# Altium PCB TIDA-00042.PcbDoc
Units mm, origin at the board's own origin, x right, y up, seen from the top; angles counter-clockwise.
Board outline 50 x 50 mm, 2 copper layers (Top Layer, Bottom Layer); 33 components, 22 nets, 90 pads, 186 vias.
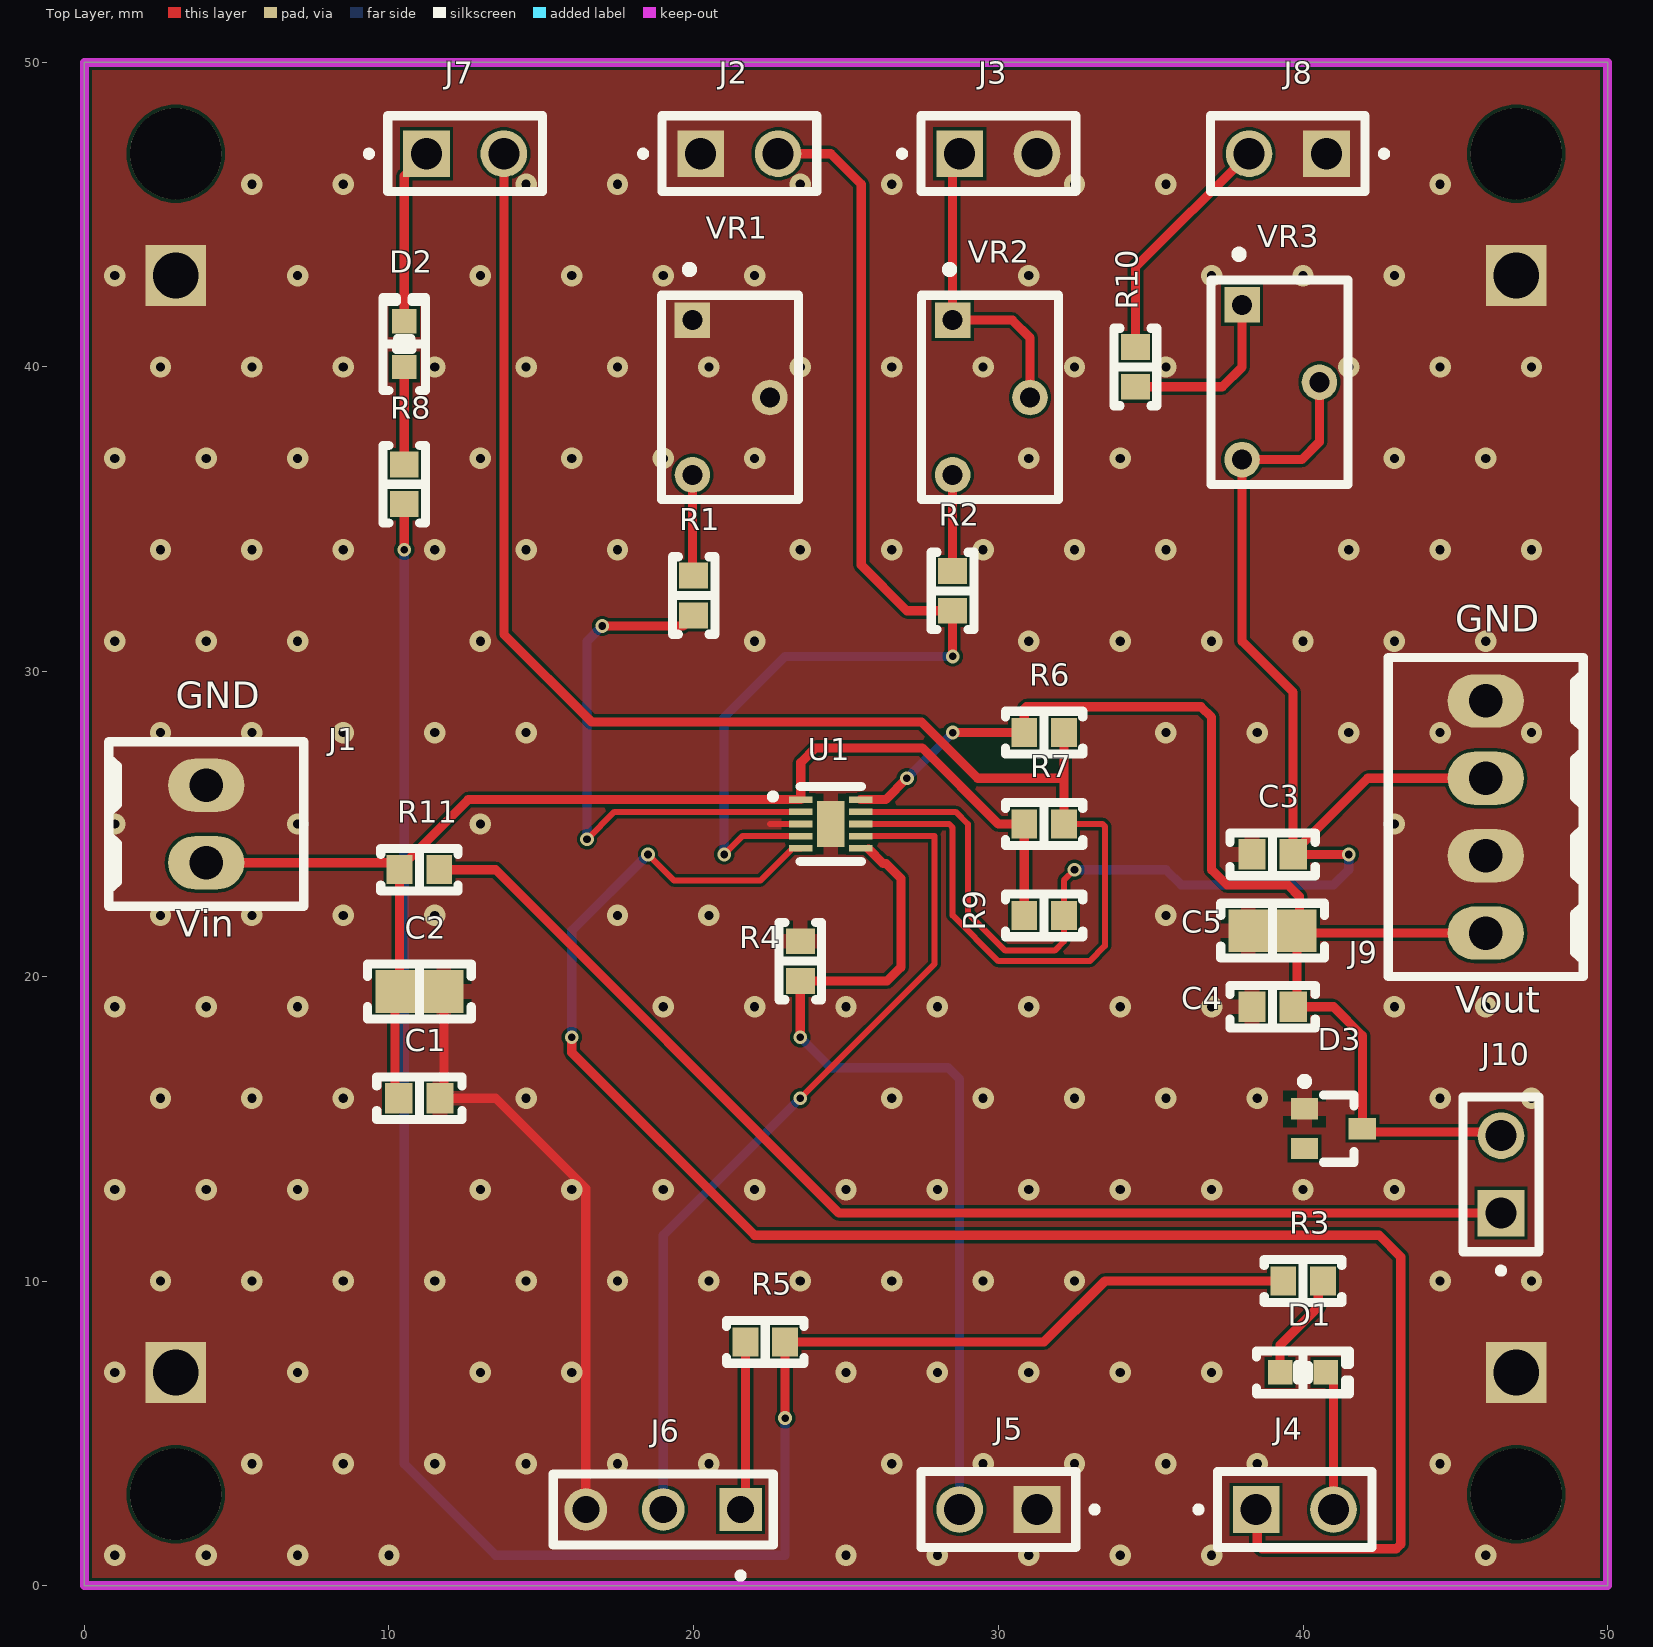
[diagram p0: Top Layer view]
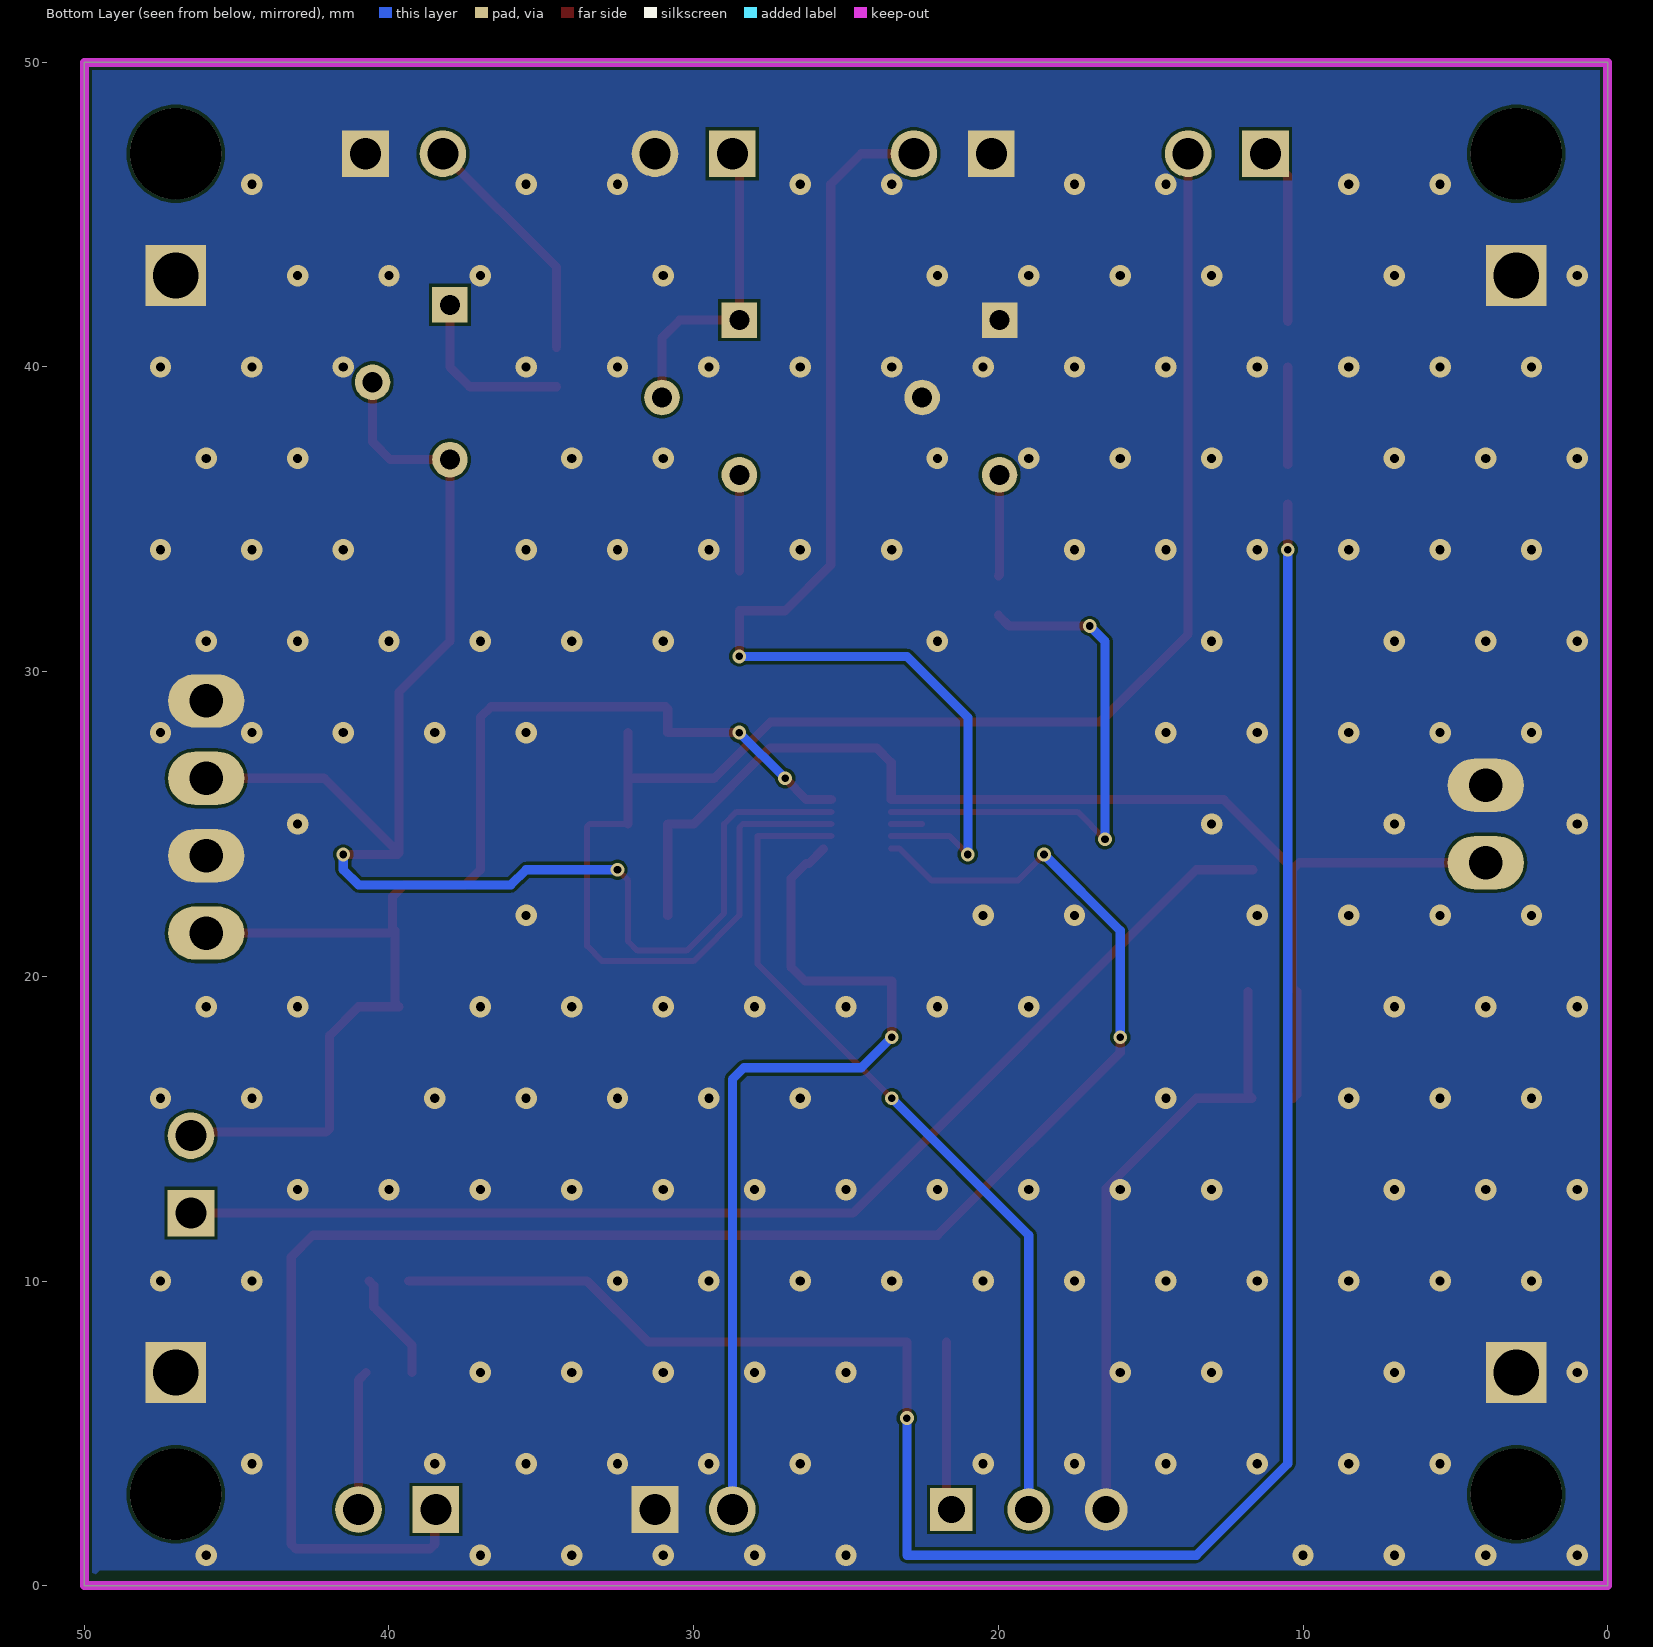
[diagram p1: Bottom Layer view, seen from below]
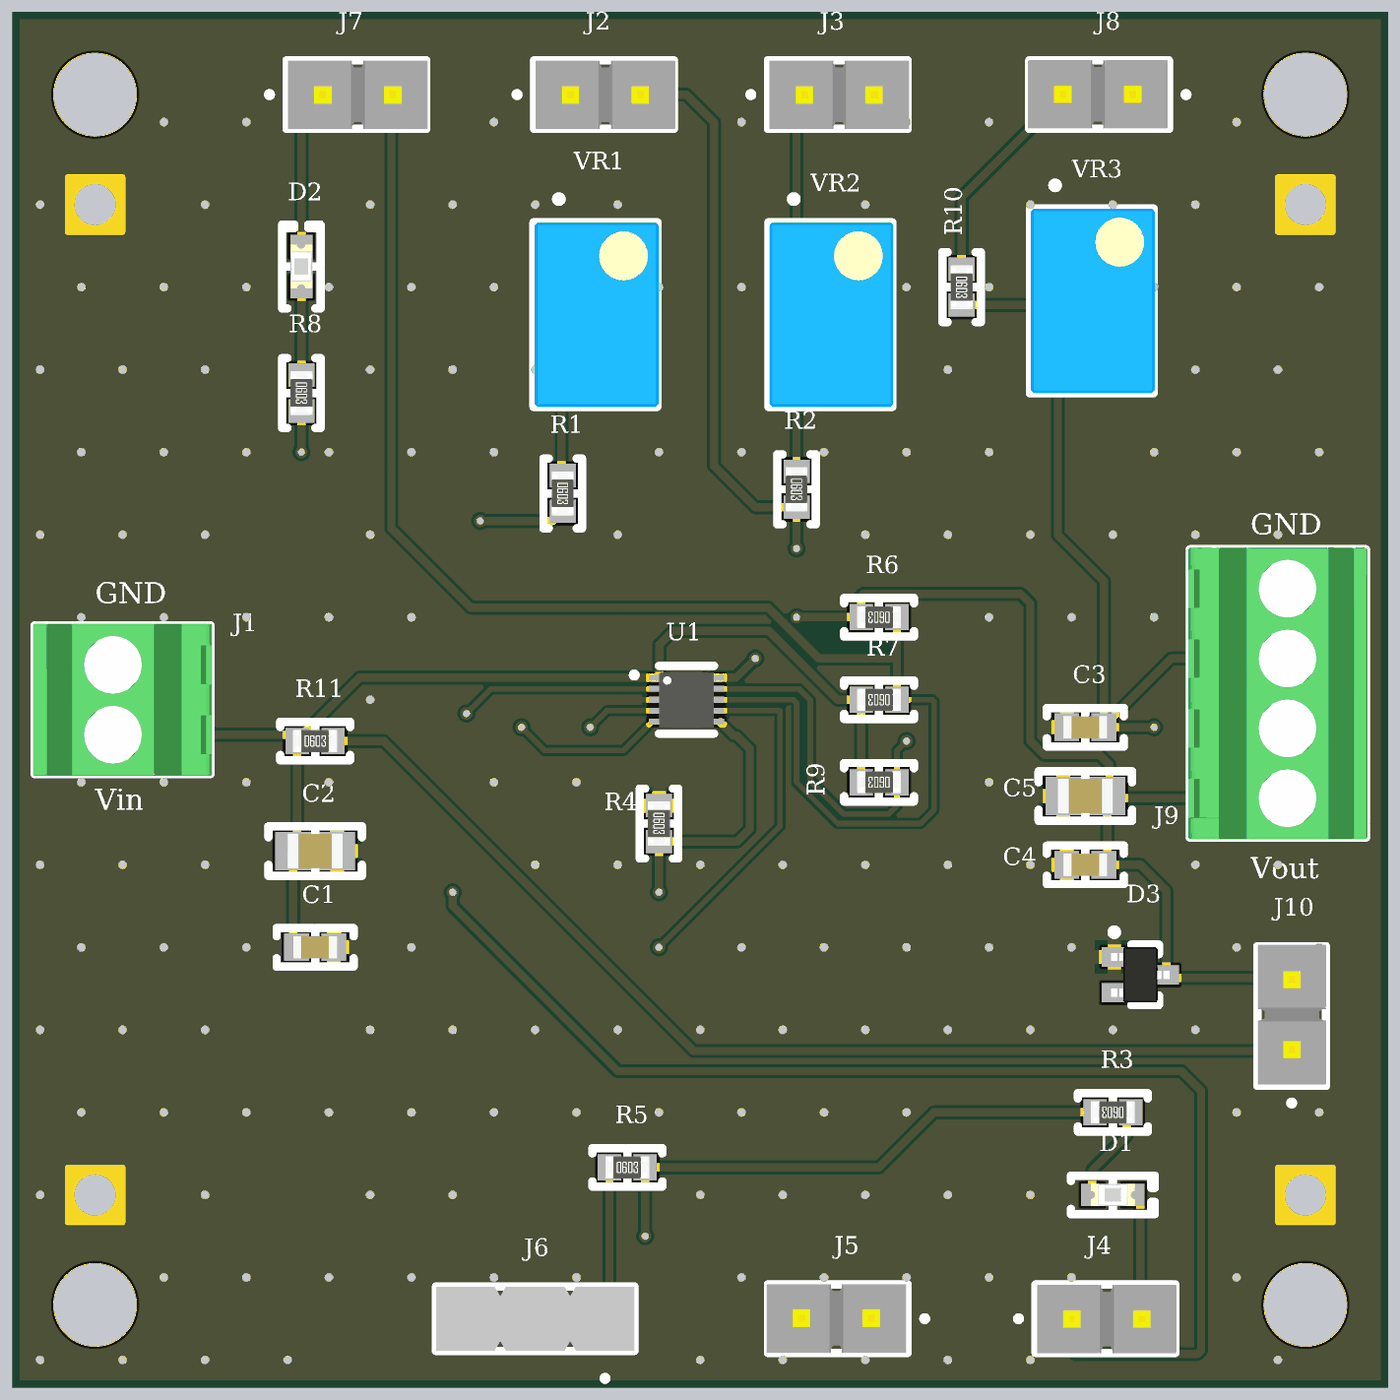
[diagram p2: 3D render of the assembled board from above, using the file's embedded part models]

## Layer stack, top to bottom
Top Solder: solder mask 0.0102, Solder Resist, Dk 3.5
Top Layer: signal copper 0.0356
Dielectric 1: dielectric 0.32, FR-4, Dk 4.8
Bottom Layer: signal copper 0.0356
Bottom Solder: solder mask 0.0102, Solder Resist, Dk 3.5

## Board outline
0,0 0,50 50,50 50,0

## Design rules (kind name [scope] priority, off if disabled: settings)
Clearance [All] p1: gap=0.102 ignorepadtopadclearanceinfootprint=FALSE
PolygonConnect [All] p1: thpad.connectstyle=Direct thpad.reliefconductorwidth=0.5 thpad.reliefentries=4 thpad.polygonreliefangle="90 Angle" thpad.airgapwidth=0.25 smdpad.connectstyle=Relief smdpad.reliefconductorwidth=0.5 smdpad.reliefentries=4 smdpad.polygonreliefangle="90 Angle" smdpad.airgapwidth=0.25 via.connectstyle=Direct via.reliefconductorwidth=0.5 via.reliefentries=4 via.polygonreliefangle="90 Angle" via.airgapwidth=0.25
RoutingVias [All] p1: holewidth=0.25 width=0.45 viastyle="Through Hole" minholewidth=0.2 minwidth=0.45 maxholewidth=1 maxwidth=1.6
SolderMaskExpansion [All] p1: expansion=0.102 istentingtop=FALSE
Width [All] p1: maxlimit=1 minlimit=0.102 preferedwidth=0.2
30 further rules are at their usual default settings.

## Components (designator, comment, footprint, x,y, rotation, side; value= is the part's Value field where it differs from the comment)
C1 "1 µF" "CAP 0603_1608" 11,16 r180 top
C2 "1µF" "CAP 0805_2012" 11,19.5 r180 top
C3 "2.2 µF" "CAP 0603_1608" 39,24 r0 top
C4 "2.2 µF" "CAP 0603_1608" 39,19 r0 top
C5 "2.2 µF" "CAP 0805_2012" 39,21.5 r0 top
D1 "Green" "LED 0603_1608 GREEN" 40,7 r0 top
D2 "Green" "LED 0603_1608 GREEN" 10.5,40.75 r90 top
D3 "BZX84C5V6W-7-F" "DIODES SOT-323-3" 41,15 r0 top
J1 "282834-2" "TE 282834-2" 4,25 r90 top
J2 "ASI GND" SAMTEC_HTSW-102-08-L-S 21.5,47 r180 top
J3 "PRETERM" SAMTEC_HTSW-102-08-L-S 30,47 r180 top
J4 "PG" SAMTEC_HTSW-102-08-L-S 39.73,2.5 r180 top
J5 "ASO GND" SAMTEC_HTSW-102-08-L-S 30,2.5 r0 top
J6 "5-146280-3" TE_5-146280-3 19,2.5 r180 top
J7 "CHG" SAMTEC_HTSW-102-08-L-S 12.5,47 r180 top
J8 "TS" SAMTEC_HTSW-102-08-L-S 39.5,47 r0 top
J9 "282834-4" "TE 282834-4" 46,25.23 r270 top
J10 "HTSW-102-08-L-S" SAMTEC_HTSW-102-08-L-S 46.5,13.5 r270 top
R1 "680 Ohms" "RES 0603_1608" 20,32.5 r270 top
R2 "1 kOhms" "RES 0603_1608" 28.5,32.65 r270 top
R3 "1.5 kOhms" "RES 0603_1608" 40,10 r180 top
R4 "100 kOhms" "RES 0603_1608" 23.5,20.5 r270 top
R5 "10 kOhms" "RES 0603_1608" 22.35,8 r0 top
R6 "0 Ohms" "RES 0603_1608" 31.5,28 r180 top
R7 "0 Ohms" "RES 0603_1608" 31.5,25 r180 top
R8 "1.5 kOhms" "RES 0603_1608" 10.5,36.15 r270 top
R9 "0 Ohms" "RES 0603_1608" 31.5,22 r180 top
R10 "1 kOhms" "RES 0603_1608" 34.5,40 r270 top
R11 "100 kOhms" "RES 0603_1608" 11,23.5 r0 top
U1 "BQ24041DSQ" SON40P200X200X80-11N 24.5,25 r0 top
VR1 "3266W-1-103LF" TRIM_3266W-1-103LF 19.96,39 r270 top
VR2 "3266W-1-103LF" TRIM_3266W-1-103LF 28.5,39 r270 top
VR3 "3266W-1-103LF" TRIM_3266W-1-103LF 38,39.5 r270 top

## Footprints (in the part's own frame and the unit in brackets; to place one, negate y for a bottom-side part, rotate by r counter-clockwise, add the part's x,y. Pads: shape width x height; smd on the part's side, far side on the other; paste and mask are expansions set on the pad)
"CAP 0603_1608" [mm] "Chip Capacitor, 2-Leads, Body 1.60x0.80mm, IPC Medium Density"
  rect 0.9x1 smd: 1(-0.675,0) 2(0.675,0)
  silkscreen extent -1.4,-0.7 1.4,0.7, body extent -0.8,-0.41 0.8,0.41, height 0.82
"CAP 0805_2012" [mm] "Chip Capacitor, 2-Leads, Body 2.00x1.20mm, IPC Medium Density"
  rect 1.3x1.4 smd: 1(-0.8,0) 2(0.8,0)
  silkscreen extent -1.7,-0.9 1.7,0.9, body extent -1,-0.64 1,0.64, height 1.26
"DIODES SOT-323-3" [mm] "SOT323, 3-Leads, Body 2.00x2.10mm, Pitch 0.65mm, IPC Medium Density"
  rect 0.9x0.7 smd: 1(-0.95,0.65) 2(0.95,0) 3(-0.95,-0.65)
  silkscreen extent -1.07,-1.1 0.67,1.67, body extent -1.06,-1 1.06,1, height 1
"LED 0603_1608 GREEN" [mm] "Chip Diode, 2-Leads, Body 1.60x0.80mm, IPC Medium Density"
  rect 0.8x0.8 smd: 1(-0.75,0) 2(0.75,0)
  silkscreen extent -1.52,-0.7 1.52,0.7, body extent -0.8,-0.4 0.8,0.4, height 0.53
"RES 0603_1608" [mm] "Chip Resistor, 2-Leads, Body 1.60x0.80mm, IPC Medium Density"
  rect 0.85x0.95 smd: 1(-0.65,0) 2(0.65,0)
  silkscreen extent -1.27,-0.7 1.27,0.7, body extent -0.8,-0.4 0.8,0.4, height 0.45
SAMTEC_HTSW-102-08-L-S [mm]
  rect 1.53x1.53 hole 1.02: 01(1.27,0)
  round 1.53 hole 1.02: 02(-1.27,0)
  silkscreen extent -2.54,-1.24 3.26,1.24, body extent -2.59,-1.23 2.49,1.26, height 8.38
SON40P200X200X80-11N [mm]
  rect 0.76x0.22 smd: 1(-0.985,0.8) 2(-0.985,0.4) 3(-0.985,0) 4(-0.985,-0.4) 5(-0.985,-0.8) 6(0.985,-0.8) 7(0.985,-0.4) 8(0.985,0) 9(0.985,0.4) 10(0.985,0.8)
  rect 0.9x1.5 smd paste-2: 11(0,0)
  silkscreen extent -2,-1.23 1,1.23, body extent -1,-1 1,1, height 0.8
"TE 282834-2" [mm]
  oval 1.75x2.5 hole 1.1: 1(-1.27,0) 2(1.27,0)
  silkscreen extent -2.7,-3.2 2.7,3.2, body extent -2.77,-3.25 2.77,3.25, height 10
"TE 282834-4" [mm]
  oval 1.75x2.5 hole 1.1: 1(-3.81,0) 2(-1.27,0) 3(1.27,0) 4(3.81,0)
  silkscreen extent -5.24,-3.2 5.24,3.2, body extent -5.31,-3.25 5.31,3.25, height 10
TE_5-146280-3 [mm]
  rect 1.398x1.398 hole 0.89: 1(-2.54,0)
  round 1.398 hole 0.89: 2(0,0) 3(2.54,0)
  silkscreen extent -3.61,-1.17 3.61,2.27, body extent -3.61,-1.17 3.61,1.17, height 8.38
TRIM_3266W-1-103LF [mm]
  rect 1.168x1.168 hole 0.66: 1(-2.54,0)
  round 1.168 hole 0.66: 2(0,2.54) 3(2.54,0)
  silkscreen extent -4.3,-1.02 3.35,3.48, body extent -3.35,-0.98 3.35,3.52, height 9.72

## Part data
C1: library part CC0603KRX5R8BB105, "CAP CER 1UF 25V X5R 0603", Device Package="0603 (1608 Metric)", manufacturer=Yageo, Operating Temperature="-55°C ~ 85°C", Supplier Part Number 1=311-1445-1-ND, Temperature Coefficient=X5R, Tolerance=±10%, Voltage - Rated=25V, Applications="General Purpose", Capacitance="1 µF", componentlink1description=Datasheet, componentlink1url=https://www.yageo.com/upload/media/product/productsearch/datasheet/mlcc/UPY-GPHC_X5R_4V-to-50V_25.pdf, componentlink2description="DigiKey Link", componentlink2url=https://www.digikey.com/en/products/detail/yageo/CC0603KRX5R8BB105/2833610, lastupdated="25.08.2022 06:49:33", Lifecycle Status=Active, Minimum Order=1, Mounting Type="Surface Mount, MLCC", Package / Case="0603 (1608 Metric)", packaging=TapeAndReel, Part Number=CC0603KRX5R8BB105, Part Status=Active, partid=5146, price=0.01, series=CC, Size / Dimension="0.063\" L x 0.031\" W (1.60mm x 0.80mm)", Supplier 1=DigiKey, Thickness (Max)="0.035\" (0.90mm)"
C2: library part 08053D105KAT2A, "CAP CER 1UF 25V X5R 0805", Device Package="0805 (2012 Metric)", manufacturer="AVX Corporation", Operating Temperature="-55°C ~ 85°C", Supplier Part Number 1=478-1409-1-ND, Temperature Coefficient=X5R, Tolerance=±10%, Voltage - Rated=25V, Applications="General Purpose", Capacitance=1µF, componentlink1description=Datasheet, componentlink1url=http://datasheets.avx.com/cx5r.pdf, componentlink2description="DigiKey Link", componentlink2url=http://digikey.com/product-detail/en/avx-corporation/08053D105KAT2A/478-1409-1-ND/564441, lastupdated="2.09.2020 01:04:40", Lifecycle Status=Active, Minimum Order=1, Mounting Type="Surface Mount, MLCC", Package / Case="0805 (2012 Metric)", packaging=TapeAndReel, Part Number=08053D105KAT2A, Part Status=Active, partid=3127, price=0.12, series=-, Size / Dimension="0.079\" L x 0.049\" W (2.01mm x 1.25mm)", Supplier 1=DigiKey, Thickness (Max)="0.055\" (1.40mm)"
C3: library part CL10A225KA5LNNC, "CAP CER 2.2UF 25V X5R 0603", Device Package="0603 (1608 Metric)", manufacturer="Samsung Electro-Mechanics", Operating Temperature="-55°C ~ 85°C", Supplier Part Number 1=1276-1878-1-ND, Temperature Coefficient=X5R, Tolerance=±10%, Voltage - Rated=25V, Applications="General Purpose", Capacitance="2.2 µF", componentlink1description=Datasheet, componentlink1url=http://www.samsungsem.com/kr/support/product-search/mlcc/CL10A225KA5LNNC.jsp, componentlink2description="DigiKey Link", componentlink2url=https://www.digikey.com/en/products/detail/samsung-electro-mechanics/CL10A225KA5LNNC/3887536, Features="Low Profile", lastupdated="25.08.2022 06:49:10", Lifecycle Status=Active, Minimum Order=1, Mounting Type="Surface Mount, MLCC", Package / Case="0603 (1608 Metric)", packaging=TapeAndReel, Part Number=CL10A225KA5LNNC, Part Status=Active, partid=12827, price=0.03, series=CL, Size / Dimension="0.063\" L x 0.031\" W (1.60mm x 0.80mm)", Supplier 1=DigiKey, Thickness (Max)="0.020\" (0.50mm)"
C4: library part CL10A225KP8NNNC, "CAP CER 2.2UF 10V X5R 0603", Device Package="0603 (1608 Metric)", manufacturer="Samsung Electro-Mechanics", Operating Temperature="-55°C ~ 85°C", Supplier Part Number 1=1276-1085-1-ND, Temperature Coefficient=X5R, Tolerance=±10%, Voltage - Rated=10V, Applications="General Purpose", Capacitance="2.2 µF", componentlink1description=Datasheet, componentlink1url=http://www.samsungsem.com/kr/support/product-search/mlcc/CL10A225KP8NNNC.jsp, componentlink2description="DigiKey Link", componentlink2url=https://www.digikey.com/en/products/detail/samsung-electro-mechanics/CL10A225KP8NNNC/3886743, lastupdated="25.08.2022 06:49:32", Lifecycle Status=Active, Minimum Order=1, Mounting Type="Surface Mount, MLCC", Package / Case="0603 (1608 Metric)", packaging=TapeAndReel, Part Number=CL10A225KP8NNNC, Part Status=Active, partid=5601, price=0.01, series=CL, Size / Dimension="0.063\" L x 0.031\" W (1.60mm x 0.80mm)", Supplier 1=DigiKey, Thickness (Max)="0.035\" (0.90mm)"
C5: library part CC0805KKX5R6BB225, "CAP CER 2.2UF 10V X5R 0805", Device Package="0805 (2012 Metric)", manufacturer=Yageo, Operating Temperature="-55°C ~ 85°C", Supplier Part Number 1=311-1862-1-ND, Temperature Coefficient=X5R, Tolerance=±10%, Voltage - Rated=10V, Applications="General Purpose", Capacitance="2.2 µF", componentlink1description=Datasheet, componentlink1url=https://www.yageo.com/upload/media/product/productsearch/datasheet/mlcc/UPY-GPHC_X5R_4V-to-50V_25.pdf, componentlink2description="DigiKey Link", componentlink2url=https://www.digikey.com/en/products/detail/yageo/CC0805KKX5R6BB225/5195268, lastupdated="25.08.2022 06:52:53", Lifecycle Status=Active, Minimum Order=1, Mounting Type="Surface Mount, MLCC", Package / Case="0805 (2012 Metric)", packaging=TapeAndReel, Part Number=CC0805KKX5R6BB225, Part Status=Active, partid=41304, price=0.04, series=CC, Size / Dimension="0.079\" L x 0.049\" W (2.00mm x 1.25mm)", Supplier 1=DigiKey, Thickness (Max)="0.057\" (1.45mm)"
D1 D2: library part LTST-C190GKT, "LED GREEN CLEAR CHIP SMD", Current - Test=10mA, Device Package="0603 (1608 Metric)", Lens Color=Colorless, manufacturer="Lite-On Inc.", Millicandela Rating=6mcd, Supplier Device Package="Chip LED", Supplier Part Number 1=160-1183-1-ND, Voltage - Forward (Vf) (Typ)=2.1V, Color=Green, componentlink1description=Datasheet, componentlink1url=//media.digikey.com/pdf/Data%20Sheets/Lite-On%20PDFs/LTST-C190GKT.pdf, componentlink2description="DigiKey Link", componentlink2url=http://digikey.com/product-detail/en/lite-on-inc/LTST-C190GKT/160-1183-1-ND/269255, Configuration=Standard, Height (Max)=0.90mm, lastupdated="25.08.2022 07:37:41", Lens Size="1.10mm x 0.80mm", Lens Style="Rectangle with Flat Top", Lens Transparency=Clear, Lifecycle Status=Active, Minimum Order=1, Mounting Type="Surface Mount", Package / Case="0603 (1608 Metric)", packaging=TapeAndReel, Part Number=LTST-C190GKT, Part Status=Active, partid=656, price=0.04, series=-, Size / Dimension="1.60mm L x 0.80mm W", Supplier 1=DigiKey, Viewing Angle=130°, Wavelength - Dominant=569nm, Wavelength - Peak=565nm
D3: "DIODE ZENER 5.6V 200MW SOT323", Current - Reverse Leakage @ Vr="1 µA @ 2 V", manufacturer="Diodes Incorporated", Operating Temperature="-65°C ~ 125°C", Package / Case="SC-70, SOT-323", Power - Max="200 mW", Supplier Device Package=SOT-323, Supplier Part Number 1=BZX84C5V6W-FDICT-ND, Tolerance=±7%, Voltage - Forward (Vf) (Max) @ If="900 mV @ 10 mA", Voltage - Zener (Nom) (Vz)="5.6 V", componentlink1description=Datasheet, componentlink1url=https://www.diodes.com/assets/Datasheets/ds30066.pdf, componentlink2description="DigiKey Link", componentlink2url=https://www.digikey.com/en/products/detail/diodes-incorporated/BZX84C5V6W-7-F/814913, lastupdated="25.08.2022 07:38:41", Lifecycle Status=Active, Minimum Order=1, Mounting Type="Surface Mount", packaging=TapeAndReel, Part Number=BZX84C5V6W-7-F, Part Status=Active, partid=879, price=0.04, series=-, Supplier 1=DigiKey, Impedance (Max) (Zzt)="40 Ohms"
J1: "TERM BLK 2P SIDE ENT 2.54MM PCB", Color=Green, Current=10A, manufacturer="TE Connectivity AMP Connectors", Supplier Part Number 1=A98333-ND, Voltage=150V, componentlink1description=Datasheet, componentlink1url=https://www.te.com/commerce/DocumentDelivery/DDEController?Action=srchrtrv&DocNm=282834&DocType=Customer+Drawing&DocLang=English, componentlink2description="DigiKey Link", componentlink2url=http://digikey.com/product-detail/en/te-connectivity-amp-connectors/282834-2/A98333-ND/1150135, lastupdated="15.01.2020 04:15:38", Lifecycle Status=Active, Mating Orientation="Horizontal with Board", Minimum Order=1, Mounting Type="Through Hole", Number of Levels=1, packaging=Bulk, Part Number=282834-2, Part Status=Active, Pitch="0.100\" (2.54mm)", Positions Per Level=2, price=0.88, series=Buchanan, Supplier 1=DigiKey, Wire Gauge="16-30 AWG", Wire Termination="Screw - Rising Cage Clamp"
J2 J3 J4 J5 J7 J8: library part HTSW-102-08-L-S, "Conn Unshrouded Header HDR 2 POS 2.54mm Solder ST Top Entry Thru-Hole Bag", Package=None, Availability="In Stock", Check_prices=https://www.snapeda.com/parts/HTSW-102-08-L-S/Samtec/view-part/?ref=eda, MF="Samtec Inc.", MP=HTSW-102-08-L-S, price=None, Purchase-URL=https://pricing.snapeda.com/search/part/HTSW-102-08-L-S/?ref=eda, SnapEDA_Link=https://www.snapeda.com/parts/HTSW-102-08-L-S/Samtec/view-part/?ref=snap
J6: "Header; Conn; Interconnect System; PCB Plug; 3 Cont; Thru-Hole; Breakaway; Straight; 3A", Package=None, Availability=Unavailable, Centerline_Pitch="2.54 mm[.1 in]", MF="TE Connectivity", MP=5-146280-3, Number_of_Positions=3, price=None, Product_Type=Connector, SnapEDA_Link=https://www.snapeda.com/parts/5-146280-3/TE%20Connectivity%20AMP%20Connectors/view-part/2778485/?ref=snap, TE_purchase_URL=https://www.te.com/usa-en/product-5-146280-3.html?te_bu=Cor&te_type=disp&te_campaign=seda_glo_cor-seda-global-disp-prtnr-fy19-seda-model-bom-cta_sma-317_1&elqCampaignId=32493
J9: "TERM BLK 4P SIDE ENT 2.54MM PCB", Color=Green, Current=10A, manufacturer="TE Connectivity AMP Connectors", Supplier Part Number 1=A98335-ND, Voltage=150V, componentlink1description=Datasheet, componentlink1url=https://www.te.com/commerce/DocumentDelivery/DDEController?Action=srchrtrv&DocNm=282834&DocType=Customer+Drawing&DocLang=English, componentlink2description="DigiKey Link", componentlink2url=http://digikey.com/product-detail/en/te-connectivity-amp-connectors/282834-4/A98335-ND/1153265, lastupdated="15.01.2020 04:16:05", Lifecycle Status=Active, Mating Orientation="Horizontal with Board", Minimum Order=1, Mounting Type="Through Hole", Number of Levels=1, packaging=Bulk, Part Number=282834-4, Part Status=Active, Pitch="0.100\" (2.54mm)", Positions Per Level=4, price=2.68, series=Buchanan, Supplier 1=DigiKey, Wire Gauge="16-30 AWG", Wire Termination="Screw - Rising Cage Clamp"
J10: "Conn Unshrouded Header HDR 2 POS 2.54mm Solder ST Top Entry Thru-Hole Bag", Package=None, Availability="In Stock", Check_prices=https://www.snapeda.com/parts/HTSW-102-08-L-S/Samtec/view-part/?ref=eda, MF="Samtec Inc.", MP=HTSW-102-08-L-S, price=None, Purchase-URL=https://pricing.snapeda.com/search/part/HTSW-102-08-L-S/?ref=eda, SnapEDA_Link=https://www.snapeda.com/parts/HTSW-102-08-L-S/Samtec/view-part/?ref=snap
R1: library part CRCW0603680RFKEA, "RES SMD 680 OHM 1% 1/10W 0603", Device Package="0603 (1608 Metric)", manufacturer="Vishay Dale", Operating Temperature="-55°C ~ 155°C", Power (Watts)="0.1W, 1/10W", Ratings=AEC-Q200, Supplier Device Package=0603, Supplier Part Number 1=541-680HCT-ND, Temperature Coefficient=±100ppm/°C, Tolerance=±1%, componentlink1description=Datasheet, componentlink1url=http://www.vishay.com/docs/20035/dcrcwe3.pdf, componentlink2description="DigiKey Link", componentlink2url=http://digikey.com/product-detail/en/vishay-dale/CRCW0603680RFKEA/541-680HCT-ND/1179790, Composition="Thick Film", Features="Automotive AEC-Q200", Height - Seated (Max)="0.020\" (0.50mm)", lastupdated="25.08.2022 07:11:26", Lifecycle Status=Active, Minimum Order=1, Number of Terminations=2, Package / Case="0603 (1608 Metric)", packaging=CutTape, Part Number=CRCW0603680RFKEA, Part Status=Active, partid=12674, price=0.10, Resistance="680 Ohms", series=CRCW, Size / Dimension="0.061\" L x 0.033\" W (1.55mm x 0.85mm)", Supplier 1=DigiKey
R2 R10: library part CPF0603F1K0C1, "RES SMD 1K OHM 1% 1/16W 0603", Device Package="0603 (1608 Metric)", manufacturer="TE Connectivity Passive Product", Operating Temperature="-55°C ~ 155°C", Power (Watts)="0.063W, 1/16W", Supplier Device Package=0603, Supplier Part Number 1=A102226CT-ND, Temperature Coefficient=±50ppm/°C, Tolerance=±1%, componentlink1description=Datasheet, componentlink1url=https://www.te.com/commerce/DocumentDelivery/DDEController?Action=srchrtrv&DocNm=1773200&DocType=DS&DocLang=English, componentlink2description="DigiKey Link", componentlink2url=https://www.digikey.com/en/products/detail/te-connectivity-passive-product/CPF0603F1K0C1/2384390, Composition="Thin Film", Height - Seated (Max)="0.022\" (0.55mm)", lastupdated="25.08.2022 07:11:04", Lifecycle Status=Active, Minimum Order=1, Number of Terminations=2, Package / Case="0603 (1608 Metric)", packaging=TapeAndReel, Part Number=CPF0603F1K0C1, Part Status=Active, partid=18751, price=0.03, Resistance="1 kOhms", series="CPF, Neohm", Size / Dimension="0.061\" L x 0.031\" W (1.55mm x 0.80mm)", Supplier 1=DigiKey
R3 R8: library part CRCW06031K50FKEA, "RES SMD 1.5K OHM 1% 1/10W 0603", Device Package="0603 (1608 Metric)", manufacturer="Vishay Dale", Operating Temperature="-55°C ~ 155°C", Power (Watts)="0.1W, 1/10W", Ratings=AEC-Q200, Supplier Device Package=0603, Supplier Part Number 1=541-1.50KHCT-ND, Temperature Coefficient=±100ppm/°C, Tolerance=±1%, componentlink1description=Datasheet, componentlink1url=http://www.vishay.com/docs/20035/dcrcwe3.pdf, componentlink2description="DigiKey Link", componentlink2url=http://digikey.com/product-detail/en/vishay-dale/CRCW06031K50FKEA/541-1.50KHCT-ND/1179827, Composition="Thick Film", Features="Automotive AEC-Q200", Height - Seated (Max)="0.020\" (0.50mm)", lastupdated="25.08.2022 07:11:26", Lifecycle Status=Active, Minimum Order=1, Number of Terminations=2, Package / Case="0603 (1608 Metric)", packaging=CutTape, Part Number=CRCW06031K50FKEA, Part Status=Active, partid=12648, price=0.10, Resistance="1.5 kOhms", series=CRCW, Size / Dimension="0.061\" L x 0.033\" W (1.55mm x 0.85mm)", Supplier 1=DigiKey
R4 R11: library part CRCW0603100KFKEBC, "RES 100K OHM 1% 1/10W 0603", Device Package="0603 (1608 Metric)", manufacturer="Vishay Dale", Operating Temperature="-55°C ~ 155°C", Power (Watts)="0.1W, 1/10W", Supplier Device Package=0603, Supplier Part Number 1=541-CRCW0603100KFKEBCCT-ND, Temperature Coefficient=±100ppm/°C, Tolerance=±1%, componentlink1description=Datasheet, componentlink1url=https://www.vishay.com/docs/28773/crcwce3.pdf, componentlink2description="DigiKey Link", componentlink2url=https://www.digikey.com/en/products/detail/vishay-dale/CRCW0603100KFKEBC/7924353, Composition="Thick Film", Height - Seated (Max)="0.022\" (0.55mm)", lastupdated="25.08.2022 07:09:47", Lifecycle Status=Active, Minimum Order=1, Number of Terminations=2, Package / Case="0603 (1608 Metric)", packaging=CutTape, Part Number=CRCW0603100KFKEBC, Part Status=Active, partid=66785, price=0.01, Resistance="100 kOhms", series=CRCW-C, Size / Dimension="0.063\" L x 0.031\" W (1.60mm x 0.80mm)", Supplier 1=DigiKey
R5: library part CPF0603F10KC1, "RES SMD 10K OHM 1% 1/16W 0603", Device Package="0603 (1608 Metric)", manufacturer="TE Connectivity Passive Product", Operating Temperature="-55°C ~ 155°C", Power (Watts)="0.063W, 1/16W", Supplier Device Package=0603, Supplier Part Number 1=A102203CT-ND, Temperature Coefficient=±50ppm/°C, Tolerance=±1%, componentlink1description=Datasheet, componentlink1url=https://www.te.com/commerce/DocumentDelivery/DDEController?Action=srchrtrv&DocNm=1773200&DocType=DS&DocLang=English, componentlink2description="DigiKey Link", componentlink2url=https://www.digikey.com/en/products/detail/te-connectivity-passive-product/CPF0603F10KC1/2384568, Composition="Thin Film", Height - Seated (Max)="0.022\" (0.55mm)", lastupdated="25.08.2022 07:11:04", Lifecycle Status=Active, Minimum Order=1, Number of Terminations=2, Package / Case="0603 (1608 Metric)", packaging=TapeAndReel, Part Number=CPF0603F10KC1, Part Status=Active, partid=18824, price=0.03, Resistance="10 kOhms", series="CPF, Neohm", Size / Dimension="0.061\" L x 0.031\" W (1.55mm x 0.80mm)", Supplier 1=DigiKey
R6 R7 R9: library part CRG0603ZR, "RES SMD 0 OHM JUMPER 1/10W 0603", Device Package="0603 (1608 Metric)", manufacturer="TE Connectivity Passive Product", Operating Temperature="-55°C ~ 155°C", Power (Watts)="0.1W, 1/10W", Supplier Device Package=0603, Supplier Part Number 1=A106051CT-ND, Tolerance=Jumper, componentlink1description=Datasheet, componentlink1url=https://www.te.com/commerce/DocumentDelivery/DDEController?Action=srchrtrv&DocNm=1773204&DocType=DS&DocLang=English, componentlink2description="DigiKey Link", componentlink2url=https://www.digikey.com/en/products/detail/te-connectivity-passive-product/CRG0603ZR/2380828, Composition="Thick Film", Height - Seated (Max)="0.022\" (0.55mm)", lastupdated="25.08.2022 07:10:39", Lifecycle Status=Active, Minimum Order=1, Number of Terminations=2, Package / Case="0603 (1608 Metric)", packaging=CutTape, Part Number=CRG0603ZR, Part Status=Active, partid=23963, price=0.01, Resistance="0 Ohms", series="CRG, Neohm", Size / Dimension="0.063\" L x 0.031\" W (1.60mm x 0.80mm)", Supplier 1=DigiKey
VR1 VR2 VR3: "10 kOhms 0.25W, 1/4W PC Pins Through Hole Trimmer Potentiometer Cermet 12 Turn Top Adjustment", Package="3266 Bourns", Availability=Good, Check_prices=https://www.snapeda.com/parts/3266W-1-103LF/Bourns%20-%20J.W.%20Miller/view-part/49286/?ref=eda, MF=Bourns, MP=3266W-1-103LF, price=None, Purchase-URL=https://pricing.snapeda.com/search/part/3266W-1-103LF/?ref=eda, SnapEDA_Link=https://www.snapeda.com/parts/3266W-1-103LF/Bourns%20-%20J.W.%20Miller/view-part/49286/?ref=snap

## Free pads (board coordinates)
  rect 2x2 hole 1.5: 12(3,43) 13(47,43) 14(47,7) 15(3,7)
  round 3 hole 3: 16(3,47) 17(47,47) 18(47,3) 19(3,3)

## Via types
v1: diameter 0.7, hole 0.3, Top Layer to Bottom Layer, tented both sides, 172 vias
v2: diameter 0.45, hole 0.25, Top Layer to Bottom Layer, tented both sides, 14 vias

## Nets (pads, with @x,y where several pads share a name; then routed paths per layer and width w, separated by ;. In a path a pad name is that pad's centre, name@x,y a point inside that pad or via, vN(x,y) a via of type N, cw(c..) or ccw(c..) an arc to the next point about the centre after c; other vN are vias at no path point)
GND: C1.1 C2.1 C3.1 C4.1 C5.1 D3.1 J1.2 J2.01 J3.02 J5.01 J6.3 J8.01 J9.1 J9.3 pad.12 pad.13 pad.14 pad.15 R4.1 U1.3 U1.11 VR1.1 VR1.2 | length 21.1
  Top Layer w0.2: 22.5,25 U1.3
  Top Layer w0.3: C2.1 11.8,16.125 C1.1 13.5,16 16.46,13.04 J6.3
  other v1: 1,1 4,1 7,1 10,1 25,1 28,1 31,1 34,1 37,1 46,1 5.5,4 8.5,4 11.5,4 14.5,4 17.5,4 20.5,4 26.5,4 29.5,4 32.5,4 35.5,4 38.5,4 44.5,4 1,7 7,7 13,7 16,7 25,7 28,7 31,7 34,7 37,7 2.5,10 5.5,10 8.5,10 11.5,10 14.5,10 17.5,10 20.5,10 23.5,10 26.5,10 29.5,10 32.5,10 44.5,10 47.5,10 1,13 4,13 7,13 13,13 16,13 19,13 22,13 25,13 28,13 31,13 34,13 37,13 40,13 43,13 2.5,16 5.5,16 8.5,16 14.5,16 26.5,16 29.5,16 32.5,16 35.5,16 38.5,16 44.5,16 47.5,16 1,19 4,19 7,19 19,19 22,19 25,19 28,19 31,19 34,19 37,19 43,19 46,19 2.5,22 5.5,22 8.5,22 11.5,22 17.5,22 20.5,22 35.5,22 1,25 7,25 13,25 43,25 2.5,28 5.5,28 8.5,28 11.5,28 14.5,28 35.5,28 38.5,28 41.5,28 44.5,28 47.5,28 1,31 4,31 7,31 13,31 22,31 31,31 34,31 37,31 40,31 43,31 46,31 2.5,34 5.5,34 8.5,34 11.5,34 14.5,34 17.5,34 23.5,34 26.5,34 29.5,34 32.5,34 35.5,34 41.5,34 44.5,34 47.5,34 1,37 4,37 7,37 13,37 16,37 19,37 22,37 31,37 34,37 43,37 46,37 2.5,40 5.5,40 8.5,40 11.5,40 14.5,40 17.5,40 20.5,40 23.5,40 26.5,40 29.5,40 32.5,40 35.5,40 41.5,40 44.5,40 47.5,40 1,43 7,43 13,43 16,43 19,43 22,43 31,43 37,43 40,43 43,43 5.5,46 8.5,46 14.5,46 17.5,46 23.5,46 26.5,46 32.5,46 35.5,46 44.5,46
NetC3_2: C3.2 J9.2 R9.1 U1.9 VR3.2 VR3.3 | length 50.3
  Top Layer w0.2: U1.9 28.6,25.4 29,25 29,22.071 30.229,20.842 31.848,20.842 32.15,21.144 R9.1 32.15,23.15 v2(32.5,23.5)
  Top Layer w0.3: VR3.2 40.54,37.54 39.96,36.96 VR3.3 38,31 39.675,29.325 C3.2@39.675,24.05 ; v2(41.5,24) 39.725,24 C3.2@39.675,24.05 ; J9.2 42.125,26.5 C3.2@39.675,24.05
  Bottom Layer w0.3: v2(32.5,23.5) 35.5,23.5 36,23 41,23 41.5,23.5 v2(41.5,24)
NetD1_1: D1.1 R3.1 | length 3.6
  Top Layer w0.3: D1.1 39.25,7.899 40.351,9 40.5,9.149 40.5,9.85 R3.1
NetD1_2: D1.2 J4.02 | length 4.6
  Top Layer w0.3: D1.2 41,6.75 J4.02
NetD2_1: D2.1 R8.1 | length 3.2
  Top Layer w0.3: R8.1 D2.1
NetD2_2: D2.2 J7.01 | length 5.8
  Top Layer w0.3: D2.2 10.5,46.27 J7.01
NetJ2_02: J2.02 R2.2 U1.4 | length 36.4
  Top Layer w0.2: v2(21,24) 21.6,24.6 U1.4
  Top Layer w0.3: J2.02 24.5,47 25.5,46 25.5,33.5 27,32 R2.2 v2(28.5,30.5)
  Bottom Layer w0.3: v2(21,24) 21,28.5 23,30.5 v2(28.5,30.5)
NetJ3_01: J3.01 VR2.1 VR2.2 | length 10.3
  Top Layer w0.3: J3.01 28.5,46.77 VR2.1 30.46,41.54 31.04,40.96 VR2.2
NetJ4_01: J4.01 U1.5 | length 58.7
  Top Layer w0.2: v2(18.5,24) 19.35,23.15 22.195,23.15 23.245,24.2 U1.5
  Top Layer w0.3: v2(16,18) 16,17.5 22,11.5 42.5,11.5 43.21,10.79 43.21,1.359 43.062,1.21 38.649,1.21 38.5,1.359 38.5,2.46 J4.01
  Bottom Layer w0.3: v2(16,18) 16,21.5 v2(18.5,24)
NetJ5_02: J5.02 R4.2 U1.6 | length 29.6
  Top Layer w0.3: v2(23.5,18) R4.2 26.35,19.85 26.8,20.3 26.8,23.216 26.317,23.7 26.221,23.7 U1.6@25.738,24.183
  Bottom Layer w0.3: v2(23.5,18) 24.5,17 28.351,17 28.73,16.621 J5.02
NetJ6_1: J6.1 R5.1 | length 5.6
  Top Layer w0.3: J6.1 21.7,2.66 R5.1
NetJ6_2: J6.2 U1.7 | length 28.2
  Top Layer w0.2: v2(23.5,16) 27.9,20.4 27.9,24.6 U1.7
  Bottom Layer w0.3: J6.2 19,11.5 v2(23.5,16)
NetJ7_02: J7.02 R6.1 R7.1 U1.8 | length 56.2
  Top Layer w0.2: U1.8 28.383,25 28.5,24.883 28.5,22 30,20.5 33,20.5 33.5,21 33.5,24.924 33.424,25 R7.1
  Top Layer w0.3: J7.02 13.77,31.23 16.648,28.352 27.474,28.352 29.326,26.5 32.15,26.5 ; R7.1 32.15,26.5 ; R6.1 32.15,26.5
NetJ8_02: J8.02 R10.1 | length 7.9
  Top Layer w0.3: R10.1 34.5,43.27 J8.02
NetJ10_01: J10.01 R11.2 | length 39.5
  Top Layer w0.3: R11.2 13.5,23.5 24.77,12.23 J10.01
NetR1_1: R1.1 VR1.3 | length 3.3
  Top Layer w0.3: VR1.3 19.96,33.19 R1.1
NetR1_2: R1.2 U1.2 | length 17.7
  Top Layer w0.2: v2(16.5,24.5) 17.4,25.4 U1.2
  Top Layer w0.3: v2(17,31.5) 19.65,31.5 R1.2
  Bottom Layer w0.3: v2(16.5,24.5) 16.5,31 v2(17,31.5)
NetR2_1: R2.1 VR2.3 | length 3.2
  Top Layer w0.3: R2.1 VR2.3
NetR3_2: R3.2 R5.2 R8.2 | length 69.4
  Top Layer w0.3: v2(10.5,34) R8.2 ; v2(23,5.5) R5.2 31.5,8 33.5,10 R3.2
  Bottom Layer w0.3: v2(10.5,34) 10.5,4 13.5,1 23,1 v2(23,5.5)
NetR10_2: R10.2 VR3.1 | length 5.8
  Top Layer w0.3: R10.2 37.35,39.35 38,40 VR3.1
Vout: C4.2 C5.2 D3.2 J9.4 J10.02 R6.2 U1.10 | length 42
  Top Layer w0.3: U1.10 26.3,25.8 v2(27,26.5) ; v2(28.5,28) R6.2 30.85,28.774 30.926,28.85 36.65,28.85 37,28.5 37,23.5 37.5,23 39.5,23 39.88,22.62 C5.2@39.88,21.42 ; J9.4 C5.2@39.88,21.42 ; J10.02 46.385,14.885 42.065,14.885 D3.2 41.95,18.05 41,19 C4.2 39.8,19.125 C5.2 C5.2@39.88,21.42
  Bottom Layer w0.3: v2(27,26.5) v2(28.5,28)
Vın: C1.2 C2.2 J1.1 R7.2 R9.2 R11.1 U1.1 | length 41
  Top Layer w0.3: J1.1 10.12,23.73 R11.1 ; C1.2 10.2,16.125 C2.2 10.35,19.65 R11.1 ; R9.2 R7.2 30,25 27.5,27.5 24,27.5 23.515,27.015 U1.1 12.6,25.8 10.35,23.55 R11.1
pads on no net: D3.3

## Polygon pours and split planes (outlines as drawn)
GND on Bottom Layer "GND_L02_P001" (solid, remove dead copper, pour order 1): 0,50 50,50 50,0 49.5,0.5 0,0.5
GND on Top Layer "GND_L01_P000" (solid, remove dead copper, pour order 0): 50,50 50,0 0,0 0,50

## Keep-outs
Keep-Out Layer:
  the board outline again, w0.3

## Silkscreen, mask and mechanical layers (free items; w line width, h text height)
Top Overlay:
  text "GND" at 45,31.01 h1.5
  text "GND" at 3,28.51 h1.5
  text "Vin" at 3.001,21.003 h1.5
  text "Vout" at 45.001,18.512 h1.5